# Altium PCB mega8_mega16.PcbDoc
Units mil, origin at the board's own origin, x right, y up, seen from the top; angles counter-clockwise.
Board outline 6000 x 4000 mil, 2 copper layers (Top Layer, Bottom Layer); 2 components, 39 nets, 68 pads, 10 vias.
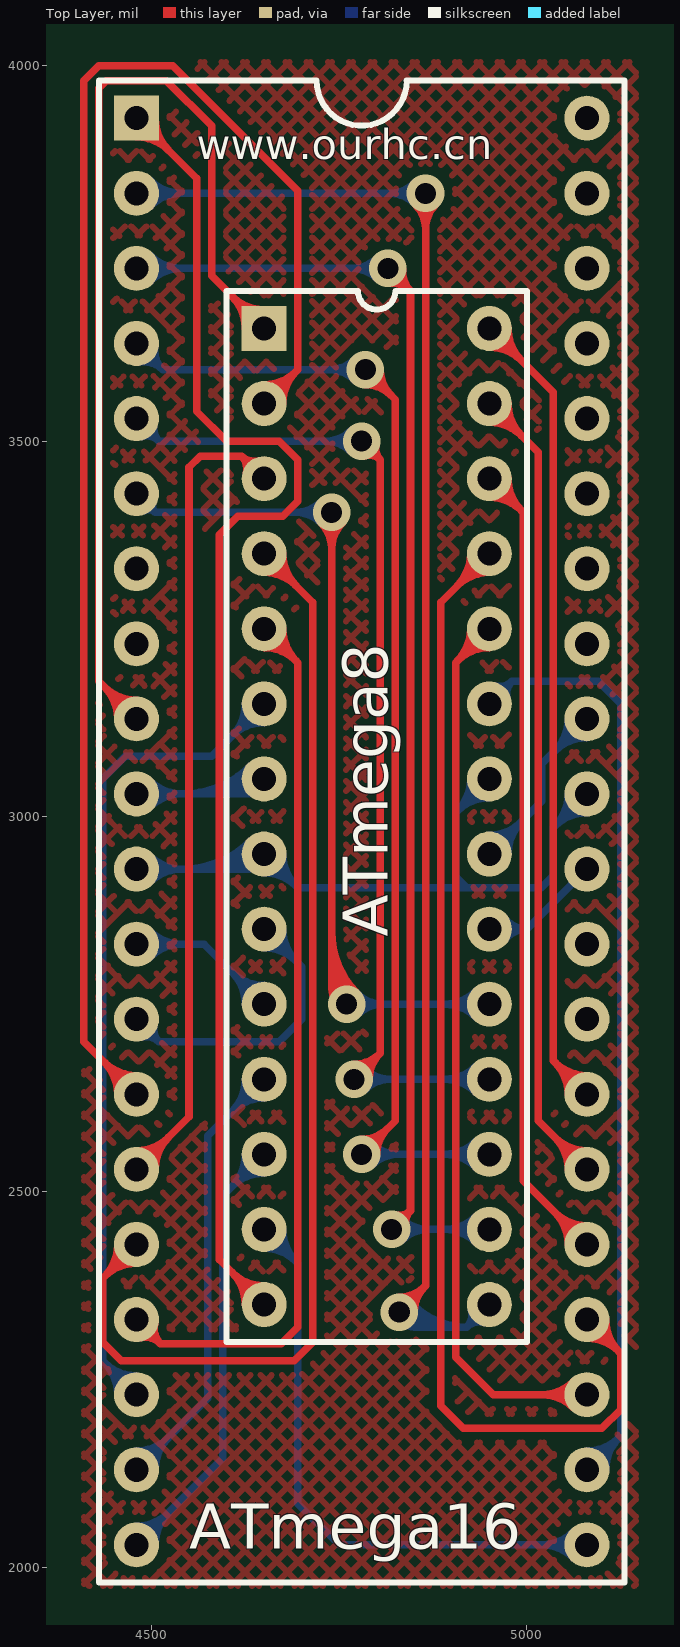
[diagram p0: Top Layer view]
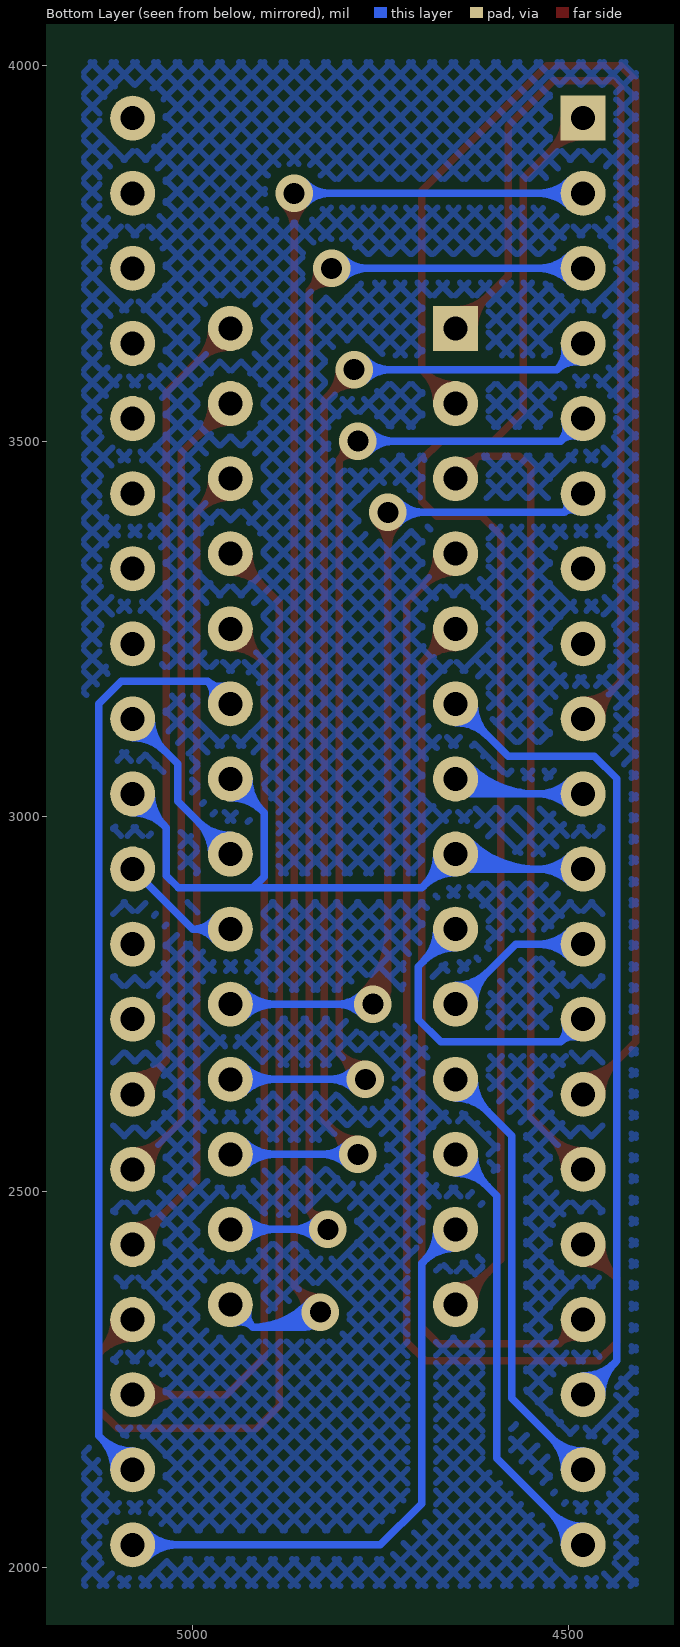
[diagram p1: Bottom Layer view, seen from below]

## Layer stack, top to bottom
Top Layer: signal copper 1.4
Dielectric: dielectric 12.6, FR-4, Dk 4.8
Bottom Layer: signal copper 1.4

## Board outline
1000,1000 7000,1000 7000,5000 1000,5000

## Design rules (kind name [scope] priority, off if disabled: settings)
Clearance [All] p1: gap=10
ComponentClearance [All] p1: gap=10 collisioncheckmode=3 verticalgap=10
PolygonConnect [All] p1: connectstyle=Relief reliefconductorwidth=10 reliefentries=4 polygonreliefangle="90 Angle"
RoutingVias [All] p1: holewidth=28 width=50 viastyle="Through Hole" minholewidth=28 minwidth=50 maxholewidth=28 maxwidth=50
SolderMaskExpansion [All] p1: expansion=4
TestPointUsage [All] p1: valid=0 allowmultiple=FALSE
Testpoint [All] p1: side=15 testpointundercomponent=TRUE minsize=40 maxsize=100 preferedsize=60 minholesize=0 maxholesize=40 preferedholesize=32 testpointgrid=1 style=1023 order=0-112345678
Width [All] p1: maxlimit=10 minlimit=10 preferedwidth=10
17 further rules are at their usual default settings.

## Components (designator, comment, footprint, x,y, rotation, side; value= is the part's Value field where it differs from the comment)
ATmega8 "ATmega8-16PI" 底座DIP-28/引脚7.62mm 4800,3000 r270 top
ATmega16 "ATmega16-16PI" 底座DIP-40/引脚15.24mm 4780,2980 r270 top (schematic designator ATmega16-)

## Footprints (in the part's own frame and the unit in brackets; to place one, negate y for a bottom-side part, rotate by r counter-clockwise, add the part's x,y. Pads: shape width x height; smd on the part's side, far side on the other; paste and mask are expansions set on the pad)
底座DIP-28/引脚7.62mm [mil] "引脚跨度 ：300 Mil ，主体外形 10.1×35.5mm（400×1400Mil）"
  rect 60x60 hole 32: 1(-650,-150)
  round 60 hole 32: 2(-550,-150) 3(-450,-150) 4(-350,-150) 5(-250,-150) 6(-150,-150) 7(-50,-150) 8(50,-150) 9(150,-150) 10(250,-150) 11(350,-150) 12(450,-150) 13(550,-150) 14(650,-150) 15(650,150) 16(550,150) 17(450,150) 18(350,150) 19(250,150) 20(150,150) 21(50,150) 22(-50,150) 23(-150,150) 24(-250,150) 25(-350,150) 26(-450,150) 27(-550,150) 28(-650,150)
  silkscreen extent -700,-200 700,200
底座DIP-40/引脚15.24mm [mil] "引脚跨度 ：600 Mil ，主体外形 17.8×50.8mm（700×2000Mil）"
  rect 60x60 hole 32: 1(-950,-300)
  round 60 hole 32: 2(-850,-300) 3(-750,-300) 4(-650,-300) 5(-550,-300) 6(-450,-300) 7(-350,-300) 8(-250,-300) 9(-150,-300) 10(-50,-300) 11(50,-300) 12(150,-300) 13(250,-300) 14(350,-300) 15(450,-300) 16(550,-300) 17(650,-300) 18(750,-300) 19(850,-300) 20(950,-300) 21(950,300) 22(850,300) 23(750,300) 24(650,300) 25(550,300) 26(450,300) 27(350,300) 28(250,300) 29(150,300) 30(50,300) 31(-50,300) 32(-150,300) 33(-250,300) 34(-350,300) 35(-450,300) 36(-550,300) 37(-650,300) 38(-750,300) 39(-850,300) 40(-950,300)
  silkscreen extent -1000,-350 1000,350

## Part data
ATmega8: library part ATmega8-P, "8 位微处理器/28引脚"
ATmega16: library part ATmega16-P, "8 位微处理器/40引脚"

## Via types
v1: diameter 50, hole 28, Top Layer to Bottom Layer, 10 vias

## Nets (pads, with @x,y where several pads share a name; then routed paths per layer and width w, separated by ;. In a path a pad name is that pad's centre, name@x,y a point inside that pad or via, vN(x,y) a via of type N, cw(c..) or ccw(c..) an arc to the next point about the centre after c; other vN are vias at no path point)
AREF: ATmega8.21 ATmega16.32 | length 537.2
  Bottom Layer w10: ATmega8.21 5020,3020 5020,3070 ATmega16.32 ; ATmega8.21@4950,2965 ccw(c4950,3001.21) 4975.61,2975.61 ccw(c5001.21,2950) ATmega8.21@4965,2950 ; ATmega8.21@4950,2975 ccw(c4950,3035.36) 4992.68,2992.68 ccw(c5035.36,2950) ATmega8.21@4975,2950 ; ATmega16.32@5055,3130 cw(c4994.64,3130) 5037.32,3087.32 cw(c5080,3044.64) ATmega16.32@5080,3105 ; ATmega16.32@5065,3130 cw(c5028.79,3130) 5054.39,3104.39 cw(c5080,3078.79) ATmega16.32@5080,3115
AVCC: ATmega8.20 ATmega16.30 | length 232.7
  Bottom Layer w10: ATmega8.20 5000,2850 ; ATmega8.20@4970,2835 cw(c5000,2812.5) 5000,2850 ; ATmega8.20@4970,2865 ccw(c5000,2887.5) 5000,2850 ; ATmega16.30 5000,2850
GND: ATmega8.8 ATmega8.22 ATmega16.11 ATmega16.31 | length 1783.2
  Bottom Layer w10: ATmega16.11 4630,2930 ATmega8.8 4695,2905 4920,2905 ; ATmega16.11@4490.61,2919.39 cw(c4516.21,2893.79) 4516.21,2930 cw(c4516.21,2966.21) ATmega16.11@4490.61,2940.61 ; ATmega16.11@4497.68,2912.32 cw(c4540.36,2869.64) 4540.36,2930 cw(c4540.36,2990.36) ATmega16.11@4497.68,2947.68 ; 4541.36,2930 ccw(c4541.36,3058.64) ATmega8.8@4632.32,2967.68 ; 4565.5,2930 ccw(c4565.5,3034.5) ATmega8.8@4639.39,2960.61 ; 4589.64,2930 ccw(c4589.64,3010.36) ATmega8.8@4646.46,2953.54 ; 4613.79,2930 ccw(c4613.79,2986.21) ATmega8.8@4653.54,2946.46 ; ATmega8.8@4650,2925 cw(c4650,2864.64) 4692.68,2907.32 cw(c4735.36,2950) ATmega8.8@4675,2950 ; ATmega8.8@4650,2935 cw(c4650,2898.79) 4675.61,2924.39 cw(c4701.21,2950) ATmega8.8@4665,2950 ; ATmega8.22@4925,3050 cw(c4864.64,3050) 4907.32,3007.32 cw(c4950,2964.64) ATmega8.22@4950,3025 ; ATmega8.22@4935,3050 cw(c4898.79,3050) 4924.39,3024.39 cw(c4950,2998.79) ATmega8.22@4950,3035 ; ATmega8.22 4905,3005 4905,2920 4920,2905 ; ATmega16.31@5055,3030 cw(c4994.64,3030) 5037.32,2987.32 cw(c5080,2944.64) ATmega16.31@5080,3005 ; ATmega16.31@5065,3030 cw(c5028.79,3030) 5054.39,3004.39 cw(c5080,2978.79) ATmega16.31@5080,3015 ; ATmega16.31 5035,2985 5035,2921 5019,2905 4920,2905
PA0: ATmega16.40
PA1: ATmega16.39
PA2: ATmega16.38
PA3: ATmega16.37
PA4: ATmega16.36
PA5: ATmega16.35
PA6: ATmega16.34
PA7: ATmega16.33
PB0: ATmega8.14 ATmega16.1 | length 2116.9
  Top Layer w10: ATmega16.1@4480,3905 cw(c4480,3844.64) 4522.68,3887.32 cw(c4565.36,3930) ATmega16.1@4505,3930 ; ATmega16.1@4480,3915 cw(c4480,3878.79) 4505.61,3904.39 cw(c4531.21,3930) ATmega16.1@4495,3930 ; ATmega16.1 4560,3850 4560,3540 4600,3500 4670,3500 4695,3475 4695,3420 4675,3400 4615,3400 4590,3375 4590,2410 ATmega8.14 ; ATmega8.14@4625,2350 ccw(c4564.64,2350) 4607.32,2392.68 ccw(c4650,2435.36) ATmega8.14@4650,2375 ; ATmega8.14@4635,2350 ccw(c4598.79,2350) 4624.39,2375.61 ccw(c4650,2401.21) ATmega8.14@4650,2365
PB1: ATmega8.15 ATmega16.2 | length 2720.9
  Top Layer w10: v1(4830,2340) 4865,2375 v1(4865,3830) ; v1@4830,2360 ccw(c4830,2408.28) 4864.14,2374.14 ccw(c4898.28,2340) v1@4850,2340 ; v1@4850.86,3815.86 cw(c4816.72,3781.72) 4865,3781.72 cw(c4913.28,3781.72) v1@4879.14,3815.86
  Bottom Layer w10: ATmega16.2 v1(4865,3830) ; ATmega16.2@4490.61,3819.39 cw(c4516.21,3793.79) 4516.21,3830 cw(c4516.21,3866.21) ATmega16.2@4490.61,3840.61 ; ATmega16.2@4497.68,3812.32 cw(c4540.36,3769.64) 4540.36,3830 cw(c4540.36,3890.36) ATmega16.2@4497.68,3847.68 ; v1@4822.58,2333.3 ccw(c4852.5,2360.31) 4852.5,2320 ; v1@4837.42,2346.7 ccw(c4897.5,2400.93) 4897.5,2320 ; v1@4838.62,2321.95 cw(c4842.93,2312.93) 4850,2320 ; v1@4844.85,2353.4 ccw(c4920,2421.24) 4920,2320 ; v1@4848.05,2331.38 ccw(c4857.07,2327.07) 4850,2320 ; v1@4850.86,3815.86 ccw(c4816.72,3781.72) 4816.72,3830 ccw(c4816.72,3878.28) v1@4850.86,3844.14 ; 4875,2320 cw(c4875,2380.62) v1(4830,2340) 4850,2320 ; ATmega8.15@4925.97,2343.1 cw(c4903.39,2336.62) 4920,2320 ; ATmega8.15@4943.1,2325.97 ccw(c4936.62,2303.39) 4920,2320 ; ATmega8.15 4920,2320 ; 4850,2320 4920,2320
PB2: ATmega8.16 ATmega16.3 | length 2328.3
  Top Layer w10: v1(4815,3730) 4845,3700 ; v1@4816.91,3710.09 cw(c4820.25,3675.26) 4845,3700 ; v1(4820,2450) 4845,2475 ; v1@4824.84,2469.41 ccw(c4829.97,2490.02) 4845,2475 ; v1@4834.91,3728.09 ccw(c4869.74,3724.75) 4845,3700 ; v1@4839.41,2454.84 cw(c4860.02,2459.97) 4845,2475 ; 4845,2475 4845,3700
  Bottom Layer w10: ATmega16.3 v1(4815,3730) ; ATmega16.3@4490.61,3719.39 cw(c4516.21,3693.79) 4516.21,3730 cw(c4516.21,3766.21) ATmega16.3@4490.61,3740.61 ; ATmega16.3@4497.68,3712.32 cw(c4540.36,3669.64) 4540.36,3730 cw(c4540.36,3790.36) ATmega16.3@4497.68,3747.68 ; v1@4800.86,3715.86 ccw(c4766.72,3681.72) 4766.72,3730 ccw(c4766.72,3778.28) v1@4800.86,3744.14 ; v1(4820,2450) ATmega8.16 ; v1@4834.14,2435.86 cw(c4868.28,2401.72) 4868.28,2450 cw(c4868.28,2498.28) v1@4834.14,2464.14 ; ATmega8.16@4932.32,2432.32 ccw(c4889.64,2389.64) 4889.64,2450 ccw(c4889.64,2510.36) ATmega8.16@4932.32,2467.68 ; ATmega8.16@4939.39,2439.39 ccw(c4913.79,2413.79) 4913.79,2450 ccw(c4913.79,2486.21) ATmega8.16@4939.39,2460.61
PB3: ATmega8.17 ATmega16.4 | length 2093.1
  Top Layer w10: v1(4780,2550) 4825,2595 4825,3555 v1(4785,3595) ; v1@4780,2570 ccw(c4780,2618.28) 4814.14,2584.14 ccw(c4848.28,2550) v1@4800,2550 ; v1@4785,3575 cw(c4785,3526.72) 4819.14,3560.86 cw(c4853.28,3595) v1@4805,3595
  Bottom Layer w10: ATmega16.4 4515,3595 ; ATmega16.4@4483.74,3605.28 cw(c4489.19,3569.2) 4515,3595 ; ATmega16.4@4504.72,3626.26 ccw(c4540.8,3620.81) 4515,3595 ; v1@4770.86,3580.86 ccw(c4736.72,3546.72) 4736.72,3595 ccw(c4736.72,3643.28) v1@4770.86,3609.14 ; v1(4780,2550) ATmega8.17 ; v1(4785,3595) 4515,3595 ; v1@4794.14,2535.86 cw(c4828.28,2501.72) 4828.28,2550 cw(c4828.28,2598.28) v1@4794.14,2564.14 ; ATmega8.17@4932.32,2532.32 ccw(c4889.64,2489.64) 4889.64,2550 ccw(c4889.64,2610.36) ATmega8.17@4932.32,2567.68 ; ATmega8.17@4939.39,2539.39 ccw(c4913.79,2513.79) 4913.79,2550 ccw(c4913.79,2586.21) ATmega8.17@4939.39,2560.61
PB4: ATmega8.18 ATmega16.5 | length 1840.3
  Top Layer w10: v1(4770,2650) 4805,2685 4805,3475 ; v1@4770,2670 ccw(c4770,2718.28) 4804.14,2684.14 ccw(c4838.28,2650) v1@4790,2650 ; v1(4780,3500) 4805,3475 ; v1@4784.84,3480.59 cw(c4789.97,3459.98) 4805,3475 ; v1@4799.41,3495.16 ccw(c4820.02,3490.03) 4805,3475
  Bottom Layer w10: ATmega16.5 4510,3500 ; ATmega16.5@4486.9,3505.97 cw(c4493.38,3483.39) 4510,3500 ; ATmega16.5@4504.03,3523.1 ccw(c4526.61,3516.62) 4510,3500 ; v1@4765.86,3485.86 ccw(c4731.72,3451.72) 4731.72,3500 ccw(c4731.72,3548.28) v1@4765.86,3514.14 ; v1(4770,2650) ATmega8.18 ; v1(4780,3500) 4510,3500 ; v1@4784.14,2635.86 cw(c4818.28,2601.72) 4818.28,2650 cw(c4818.28,2698.28) v1@4784.14,2664.14 ; ATmega8.18@4932.32,2632.32 ccw(c4889.64,2589.64) 4889.64,2650 ccw(c4889.64,2710.36) ATmega8.18@4932.32,2667.68 ; ATmega8.18@4939.39,2639.39 ccw(c4913.79,2613.79) 4913.79,2650 ccw(c4913.79,2686.21) ATmega8.18@4939.39,2660.61
PB5: ATmega8.19 ATmega16.6 | length 1810.7
  Top Layer w10: v1@4725.86,3390.86 cw(c4691.72,3356.72) 4740,3356.72 cw(c4788.28,3356.72) v1@4754.14,3390.86 ; 4740,2774.14 ccw(c4784.14,2774.14) v1@4752.93,2742.93 ; 4740,2798.28 ccw(c4808.28,2798.28) v1(4760,2750) 4740,2770 ; 4740,2822.43 ccw(c4832.43,2822.43) v1@4767.07,2757.07 ; 4740,2846.57 ccw(c4856.57,2846.57) v1@4774.14,2764.14 ; v1(4740,3405) 4740,2770 ; v1@4741.95,2758.62 ccw(c4732.93,2762.93) 4740,2770 ; v1@4751.38,2768.05 cw(c4747.07,2777.07) 4740,2770
  Bottom Layer w10: ATmega16.6 4505,3405 ; ATmega16.6@4490.78,3407.44 cw(c4496.16,3396.16) 4505,3405 ; ATmega16.6@4502.56,3419.22 ccw(c4513.84,3413.84) 4505,3405 ; v1@4725.86,3390.86 ccw(c4691.72,3356.72) 4691.72,3405 ccw(c4691.72,3453.28) v1@4725.86,3419.14 ; v1(4740,3405) 4505,3405 ; v1(4760,2750) ATmega8.19 ; v1@4774.14,2735.86 cw(c4808.28,2701.72) 4808.28,2750 cw(c4808.28,2798.28) v1@4774.14,2764.14 ; ATmega8.19@4932.32,2732.32 ccw(c4889.64,2689.64) 4889.64,2750 ccw(c4889.64,2810.36) ATmega8.19@4932.32,2767.68 ; ATmega8.19@4939.39,2739.39 ccw(c4913.79,2713.79) 4913.79,2750 ccw(c4913.79,2786.21) ATmega8.19@4939.39,2760.61
PB6: ATmega16.7
PB7: ATmega16.8
PC0: ATmega8.23 ATmega16.22 | length 1440.2
  Bottom Layer w10: ATmega8.23 4980,3180 ; ATmega8.23@4956.9,3174.03 ccw(c4963.38,3196.61) 4980,3180 ; ATmega8.23@4974.03,3156.9 cw(c4996.61,3163.38) 4980,3180 ; ATmega16.22 5125,2175 5125,3150 5095,3180 4980,3180 ; ATmega16.22@5080,2145 ccw(c5080,2181.21) 5105.61,2155.61 ccw(c5131.21,2130) ATmega16.22@5095,2130 ; ATmega16.22@5080,2155 ccw(c5080,2215.36) 5122.68,2172.68 ccw(c5165.36,2130) ATmega16.22@5105,2130
PC1: ATmega8.24 ATmega16.23 | length 1487.7
  Top Layer w10: ATmega8.24@4925,3250 cw(c4864.64,3250) 4907.32,3207.32 cw(c4950,3164.64) ATmega8.24@4950,3225 ; ATmega8.24@4935,3250 cw(c4898.79,3250) 4924.39,3224.39 cw(c4950,3198.79) ATmega8.24@4950,3235 ; ATmega8.24 4905,3205 4905,2280 4955,2230 ATmega16.23 ; ATmega16.23@5062.32,2212.32 ccw(c5019.64,2169.64) 5019.64,2230 ccw(c5019.64,2290.36) ATmega16.23@5062.32,2247.68 ; ATmega16.23@5069.39,2219.39 ccw(c5043.79,2193.79) 5043.79,2230 ccw(c5043.79,2266.21) ATmega16.23@5069.39,2240.61
PC2: ATmega8.25 ATmega16.24 | length 1866.7
  Top Layer w10: ATmega8.25@4925,3350 cw(c4864.64,3350) 4907.32,3307.32 cw(c4950,3264.64) ATmega8.25@4950,3325 ; ATmega8.25@4935,3350 cw(c4898.79,3350) 4924.39,3324.39 cw(c4950,3298.79) ATmega8.25@4950,3335 ; ATmega8.25 4885,3285 4885,2215 4915,2185 5100,2185 5125,2210 5125,2285 ATmega16.24 ; ATmega16.24@5080,2305 cw(c5080,2244.64) 5122.68,2287.32 cw(c5165.36,2330) ATmega16.24@5105,2330 ; ATmega16.24@5080,2315 cw(c5080,2278.79) 5105.61,2304.39 cw(c5131.21,2330) ATmega16.24@5095,2330
PC3: ATmega8.26 ATmega16.25 | length 1377.2
  Top Layer w10: ATmega8.26@4950,3425 cw(c4950,3364.64) 4992.68,3407.32 cw(c5035.36,3450) ATmega8.26@4975,3450 ; ATmega8.26@4950,3435 cw(c4950,3398.79) 4975.61,3424.39 cw(c5001.21,3450) ATmega8.26@4965,3450 ; ATmega8.26 4995,3405 4995,2515 ATmega16.25 ; ATmega16.25@5055,2430 ccw(c4994.64,2430) 5037.32,2472.68 ccw(c5080,2515.36) ATmega16.25@5080,2455 ; ATmega16.25@5065,2430 ccw(c5028.79,2430) 5054.39,2455.61 ccw(c5080,2481.21) ATmega16.25@5080,2445
PC4: ATmega8.27 ATmega16.26 | length 1377.2
  Top Layer w10: ATmega8.27@4950,3525 cw(c4950,3464.64) 4992.68,3507.32 cw(c5035.36,3550) ATmega8.27@4975,3550 ; ATmega8.27@4950,3535 cw(c4950,3498.79) 4975.61,3524.39 cw(c5001.21,3550) ATmega8.27@4965,3550 ; ATmega8.27 5015,3485 5015,2595 ATmega16.26 ; ATmega16.26@5055,2530 ccw(c4994.64,2530) 5037.32,2572.68 ccw(c5080,2615.36) ATmega16.26@5080,2555 ; ATmega16.26@5065,2530 ccw(c5028.79,2530) 5054.39,2555.61 ccw(c5080,2581.21) ATmega16.26@5080,2545
PC5: ATmega8.28 ATmega16.27 | length 1377.2
  Top Layer w10: ATmega8.28@4950,3625 cw(c4950,3564.64) 4992.68,3607.32 cw(c5035.36,3650) ATmega8.28@4975,3650 ; ATmega8.28@4950,3635 cw(c4950,3598.79) 4975.61,3624.39 cw(c5001.21,3650) ATmega8.28@4965,3650 ; ATmega8.28 5035,3565 5035,2675 ATmega16.27 ; ATmega16.27@5055,2630 ccw(c4994.64,2630) 5037.32,2672.68 ccw(c5080,2715.36) ATmega16.27@5080,2655 ; ATmega16.27@5065,2630 ccw(c5028.79,2630) 5054.39,2655.61 ccw(c5080,2681.21) ATmega16.27@5080,2645
PC6: ATmega16.28
PC7: ATmega16.29
PD0: ATmega8.2 ATmega16.14 | length 2346.6
  Top Layer w10: ATmega16.14@4455,2630 ccw(c4394.64,2630) 4437.32,2672.68 ccw(c4480,2715.36) ATmega16.14@4480,2655 ; ATmega16.14@4465,2630 ccw(c4428.79,2630) 4454.39,2655.61 ccw(c4480,2681.21) ATmega16.14@4480,2645 ; ATmega16.14 4410,2700 4410,3980 4430,4000 4528.29,4000 4695,3833.29 4695,3595 ATmega8.2 ; ATmega8.2@4650,3565 ccw(c4650,3601.21) 4675.61,3575.61 ccw(c4701.21,3550) ATmega8.2@4665,3550 ; ATmega8.2@4650,3575 ccw(c4650,3635.36) 4692.68,3592.68 ccw(c4735.36,3550) ATmega8.2@4675,3550
PD1: ATmega8.3 ATmega16.15 | length 1284.4
  Top Layer w10: ATmega16.15 4550,2600 4550,3465 4565,3480 4620,3480 ; ATmega16.15@4480,2545 ccw(c4480,2581.21) 4505.61,2555.61 ccw(c4531.21,2530) ATmega16.15@4495,2530 ; ATmega16.15@4480,2555 ccw(c4480,2615.36) 4522.68,2572.68 ccw(c4565.36,2530) ATmega16.15@4505,2530 ; ATmega8.3@4625.97,3456.9 ccw(c4603.39,3463.38) 4620,3480 ; ATmega8.3@4643.1,3474.03 cw(c4636.62,3496.61) 4620,3480 ; ATmega8.3 4620,3480
PD2: ATmega8.4 ATmega16.16 | length 1829.7
  Top Layer w10: ATmega16.16@4455,2430 cw(c4394.64,2430) 4437.32,2387.32 cw(c4480,2344.64) ATmega16.16@4480,2405 ; ATmega16.16@4465,2430 cw(c4428.79,2430) 4454.39,2404.39 cw(c4480,2378.79) ATmega16.16@4480,2415 ; ATmega16.16 4435,2385 4435,2300 4460,2275 4690,2275 4715,2300 4715,3285 ATmega8.4 ; ATmega8.4@4650,3325 cw(c4650,3264.64) 4692.68,3307.32 cw(c4735.36,3350) ATmega8.4@4675,3350 ; ATmega8.4@4650,3335 cw(c4650,3298.79) 4675.61,3324.39 cw(c4701.21,3350) ATmega8.4@4665,3350
PD3: ATmega8.5 ATmega16.17 | length 1395.1
  Top Layer w10: ATmega16.17 4512,2298 ; ATmega16.17@4485.55,2305.62 cw(c4491.88,2277.88) 4512,2298 ; ATmega16.17@4504.38,2324.45 ccw(c4532.12,2318.12) 4512,2298 ; ATmega8.5@4650,3225 cw(c4650,3164.64) 4692.68,3207.32 cw(c4735.36,3250) ATmega8.5@4675,3250 ; ATmega8.5@4650,3235 cw(c4650,3198.79) 4675.61,3224.39 cw(c4701.21,3250) ATmega8.5@4665,3250 ; ATmega8.5 4695,3205 4695,2320 4673,2298 4512,2298
PD4: ATmega8.6 ATmega16.18 | length 1398.4
  Bottom Layer w10: ATmega16.18@4455,2230 ccw(c4394.64,2230) 4437.32,2272.68 ccw(c4480,2315.36) ATmega16.18@4480,2255 ; ATmega16.18@4465,2230 ccw(c4428.79,2230) 4454.39,2255.61 ccw(c4480,2281.21) ATmega16.18@4480,2245 ; ATmega16.18 4435,2275 4435,3050 4465,3080 4580,3080 ATmega8.6 ; ATmega8.6@4625,3150 cw(c4564.64,3150) 4607.32,3107.32 cw(c4650,3064.64) ATmega8.6@4650,3125 ; ATmega8.6@4635,3150 cw(c4598.79,3150) 4624.39,3124.39 cw(c4650,3098.79) ATmega8.6@4650,3135
PD5: ATmega8.11 ATmega16.19 | length 893.8
  Bottom Layer w10: ATmega16.19 4575,2225 4575,2575 ATmega8.11 ; ATmega16.19@4480,2145 ccw(c4480,2181.21) 4505.61,2155.61 ccw(c4531.21,2130) ATmega16.19@4495,2130 ; ATmega16.19@4480,2155 ccw(c4480,2215.36) 4522.68,2172.68 ccw(c4565.36,2130) ATmega16.19@4505,2130 ; ATmega8.11@4625,2650 cw(c4564.64,2650) 4607.32,2607.32 cw(c4650,2564.64) ATmega8.11@4650,2625 ; ATmega8.11@4635,2650 cw(c4598.79,2650) 4624.39,2624.39 cw(c4650,2598.79) ATmega8.11@4650,2635
PD6: ATmega8.12 ATmega16.20 | length 893.8
  Bottom Layer w10: ATmega16.20 4595,2145 4595,2495 ATmega8.12 ; ATmega16.20@4480,2045 ccw(c4480,2081.21) 4505.61,2055.61 ccw(c4531.21,2030) ATmega16.20@4495,2030 ; ATmega16.20@4480,2055 ccw(c4480,2115.36) 4522.68,2072.68 ccw(c4565.36,2030) ATmega16.20@4505,2030 ; ATmega8.12@4625,2550 cw(c4564.64,2550) 4607.32,2507.32 cw(c4650,2464.64) ATmega8.12@4650,2525 ; ATmega8.12@4635,2550 cw(c4598.79,2550) 4624.39,2524.39 cw(c4650,2498.79) ATmega8.12@4650,2535
PD7: ATmega8.13 ATmega16.21 | length 1094.8
  Bottom Layer w10: ATmega8.13@4650,2425 cw(c4650,2364.64) 4692.68,2407.32 cw(c4735.36,2450) ATmega8.13@4675,2450 ; ATmega8.13@4650,2435 cw(c4650,2398.79) 4675.61,2424.39 cw(c4701.21,2450) ATmega8.13@4665,2450 ; ATmega8.13 4695,2405 4695,2085 4750,2030 ATmega16.21 ; ATmega16.21@5062.32,2012.32 ccw(c5019.64,1969.64) 5019.64,2030 ccw(c5019.64,2090.36) ATmega16.21@5062.32,2047.68 ; ATmega16.21@5069.39,2019.39 ccw(c5043.79,1993.79) 5043.79,2030 ccw(c5043.79,2066.21) ATmega16.21@5069.39,2040.61
RESET: ATmega8.1 ATmega16.9 | length 1642.1
  Top Layer w10: ATmega16.9@4455,3130 ccw(c4394.64,3130) 4437.32,3172.68 ccw(c4480,3215.36) ATmega16.9@4480,3155 ; ATmega16.9@4465,3130 ccw(c4428.79,3130) 4454.39,3155.61 ccw(c4480,3181.21) ATmega16.9@4480,3145 ; ATmega16.9 4430,3180 4430,3970 4440,3980 4520,3980 4580,3920 4580,3720 ATmega8.1 ; ATmega8.1@4625,3650 ccw(c4564.64,3650) 4607.32,3692.68 ccw(c4650,3735.36) ATmega8.1@4650,3675 ; ATmega8.1@4635,3650 ccw(c4598.79,3650) 4624.39,3675.61 ccw(c4650,3701.21) ATmega8.1@4650,3665
VCC: ATmega8.7 ATmega16.10 | length 620.3
  Bottom Layer w10: ATmega16.10 4630,3030 ATmega8.7 ; ATmega16.10@4490.61,3019.39 cw(c4516.21,2993.79) 4516.21,3030 cw(c4516.21,3066.21) ATmega16.10@4490.61,3040.61 ; ATmega16.10@4497.68,3012.32 cw(c4540.36,2969.64) 4540.36,3030 cw(c4540.36,3090.36) ATmega16.10@4497.68,3047.68 ; 4541.36,3030 ccw(c4541.36,3158.64) ATmega8.7@4632.32,3067.68 ; 4565.5,3030 ccw(c4565.5,3134.5) ATmega8.7@4639.39,3060.61 ; 4589.64,3030 ccw(c4589.64,3110.36) ATmega8.7@4646.46,3053.54 ; 4613.79,3030 ccw(c4613.79,3086.21) ATmega8.7@4653.54,3046.46
XTAL1: ATmega8.9 ATmega16.13 | length 587.3
  Bottom Layer w10: ATmega16.13 4510,2700 ; ATmega16.13@4486.9,2705.97 cw(c4493.38,2683.39) 4510,2700 ; ATmega16.13@4504.03,2723.1 ccw(c4526.61,2716.62) 4510,2700 ; ATmega8.9@4650,2825 cw(c4650,2764.64) 4692.68,2807.32 cw(c4735.36,2850) ATmega8.9@4675,2850 ; ATmega8.9@4650,2835 cw(c4650,2798.79) 4675.61,2824.39 cw(c4701.21,2850) ATmega8.9@4665,2850 ; ATmega8.9 4700,2800 4700,2730 4670,2700 4510,2700
XTAL2: ATmega8.10 ATmega16.12 | length 506.5
  Bottom Layer w10: ATmega16.12 4570,2830 ATmega8.10 ; ATmega16.12@4490.61,2819.39 cw(c4516.21,2793.79) 4516.21,2830 cw(c4516.21,2866.21) ATmega16.12@4490.61,2840.61 ; ATmega16.12@4497.68,2812.32 cw(c4540.36,2769.64) 4540.36,2830 cw(c4540.36,2890.36) ATmega16.12@4497.68,2847.68 ; ATmega8.10@4625,2750 ccw(c4564.64,2750) 4607.32,2792.68 ccw(c4650,2835.36) ATmega8.10@4650,2775 ; ATmega8.10@4635,2750 ccw(c4598.79,2750) 4624.39,2775.61 ccw(c4650,2801.21) ATmega8.10@4650,2765

## Polygon pours and split planes (outlines as drawn)
no net on Top Layer (hatched 45Degree grid 20 track 8): 4410,4005 5145,4005 5145,1975 4410,1975
no net on Bottom Layer (hatched 45Degree grid 20 track 8): 4410,4005 5145,4005 5145,1975 4410,1975

## Silkscreen, mask and mechanical layers (free items; w line width, h text height)
Top Overlay:
  text "www.ourhc.cn" at 4560,3875 h40.31
Mechanical 1:
  lines w10: 4390,4020 5160,4020 ; 4395,1960 5165,1960 ; 4395,1965 4395,4015 ; 5160,1960 5160,4015